# EAGLE board arduino_uno_pcb _with_lcd (EAGLE 6.1)
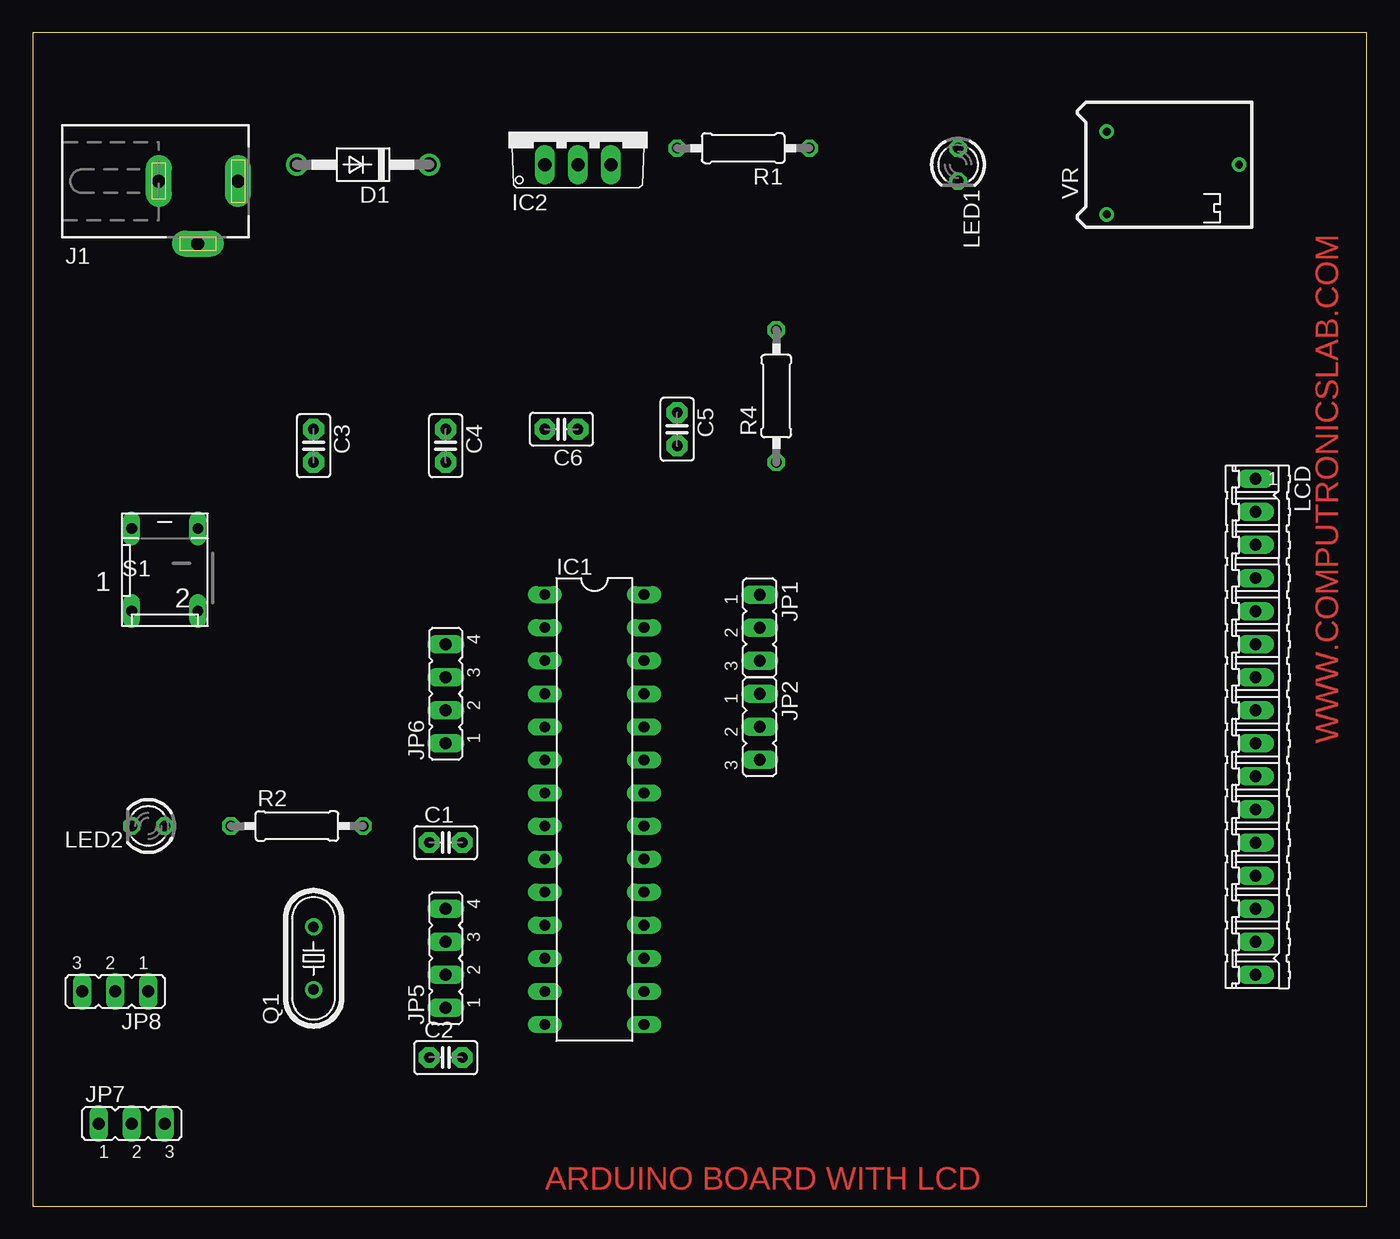
[diagram p0: board, top side]
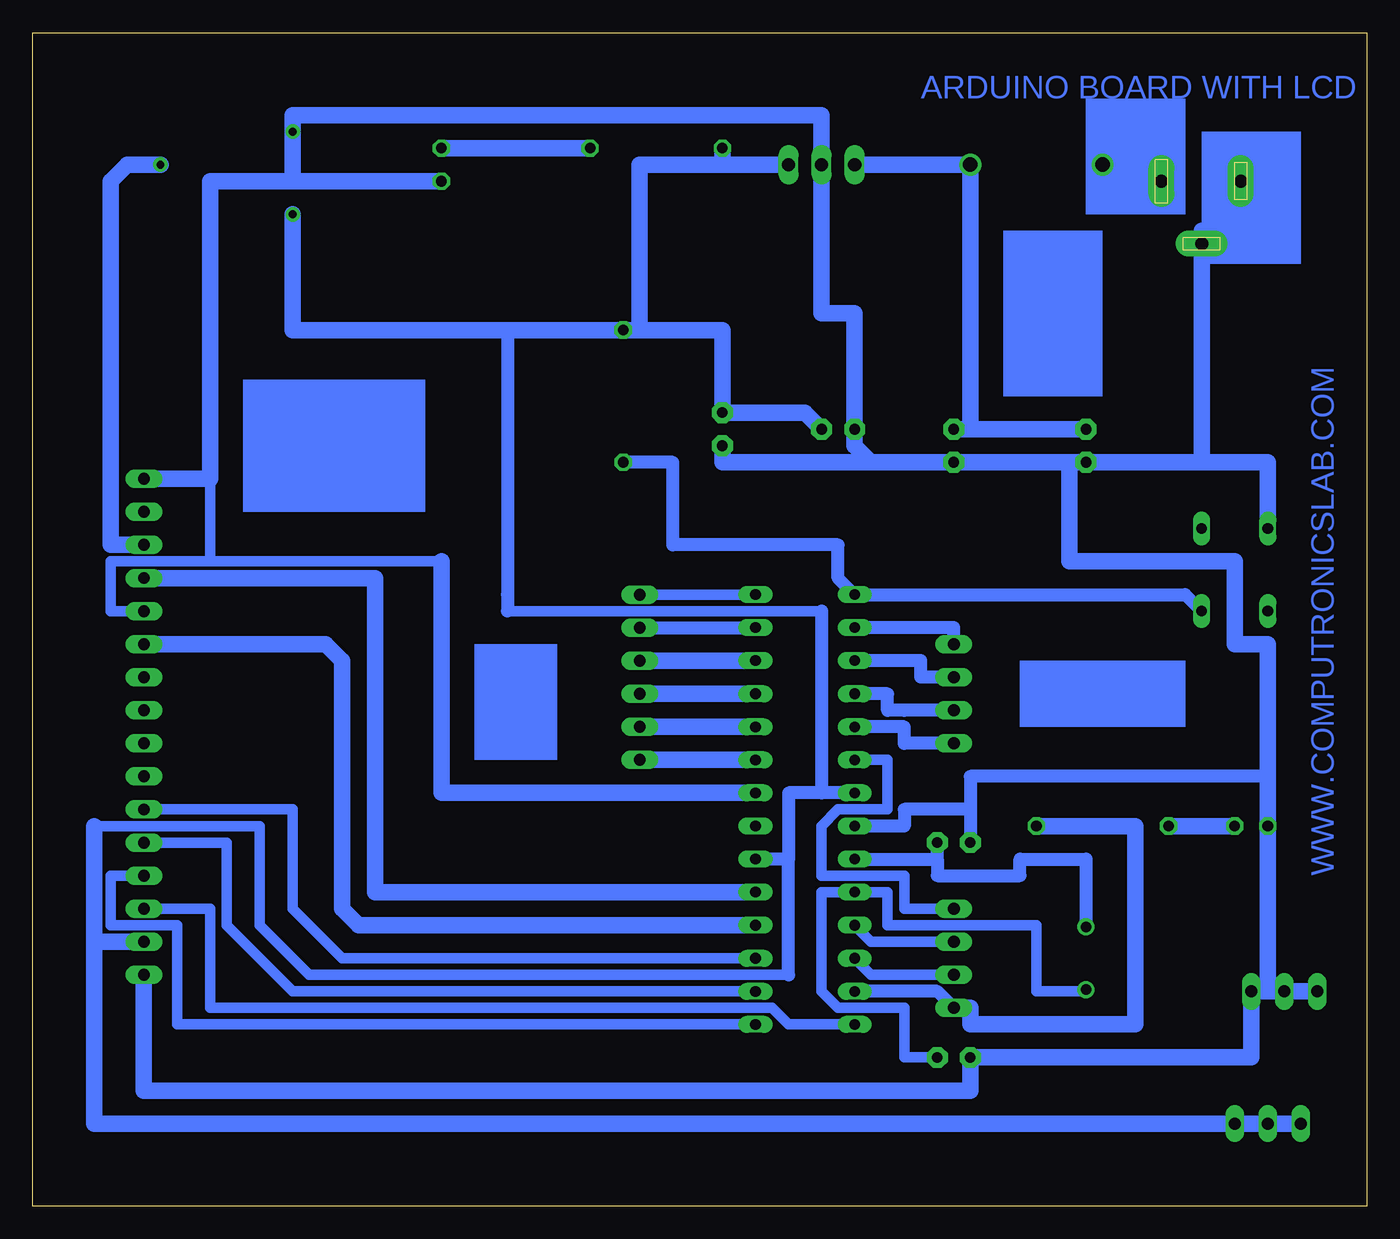
[diagram p1: board, bottom side, seen from below]

Size 102.54 x 90.16 mm. Coordinates in mm from the lower left corner, seen from the top.
Outline: 0,0 102.54,0 102.54,90.16 0,90.16 0,0
Copper layers (1*16): Top 0.035mm / dielectric 1.5mm / Bottom 0.035mm
Design rules: minimum track width 20mil, minimum drill 24mil, track to track 8mil, track to pad 8mil, pad to pad 8mil, via to via 8mil, smd to smd 8mil, copper to edge 40mil, drill to drill 8mil, minimum pad ring 10mil, minimum via ring 8mil, stop-mask expansion 4mil, vias tented up to drill 0mil, thermal gap 10mil

## Footprints (pad centres in the part's own frame; a part is rotated, then mirrored left to right if it is on the bottom)
C2.5-2 = drill 0.813 pad 1.6 octagon: 1 -1.27,0; 2 1.27,0
DO41-10 = drill 1.118: A 5.08,0; C -5.08,0
DIL28-3 = drill 0.813 long: 1 -16.51,-3.81; 2 -13.97,-3.81; 3 -11.43,-3.81; 4 -8.89,-3.81; 5 -6.35,-3.81; 6 -3.81,-3.81; 7 -1.27,-3.81; 8 1.27,-3.81; 9 3.81,-3.81; 10 6.35,-3.81; 11 8.89,-3.81; 12 11.43,-3.81; 13 13.97,-3.81; 14 16.51,-3.81; 15 16.51,3.81; 16 13.97,3.81; 17 11.43,3.81; 18 8.89,3.81; 19 6.35,3.81; 20 3.81,3.81; 21 1.27,3.81; 22 -1.27,3.81; 23 -3.81,3.81; 24 -6.35,3.81; 25 -8.89,3.81; 26 -11.43,3.81; 27 -13.97,3.81; 28 -16.51,3.81
TO220V = drill 1.016 long: 1 -2.54,-2.54; 2 0,-2.54; 3 2.54,-2.54
DCJ0303 = drill 1 pad 2 long: 1 0,3.1; 2 4.8,0; 3 0,-3
JP2 = drill 0.914 long: 1 -2.54,0; 2 0,0; 3 2.54,0
JP4 = drill 0.914 long: 1 -3.81,0; 2 -1.27,0; 3 1.27,0; 4 3.81,0
16P = drill 0.914 long: 1 -19.05,0; 2 -16.51,0; 3 -13.97,0; 4 -11.43,0; 5 -8.89,0; 6 -6.35,0; 7 -3.81,0; 8 -1.27,0; 9 1.27,0; 10 3.81,0; 11 6.35,0; 12 8.89,0; 13 11.43,0; 14 13.97,0; 15 16.51,0; 16 19.05,0
LED3MM = drill 0.813 octagon: A -1.27,0; K 1.27,0
HC49/S = drill 0.813: 1 -2.413,0; 2 2.413,0
0207/10 = drill 0.813 octagon: 1 -5.08,0; 2 5.08,0
DP-02 = drill 0.813 long: 1 -2.54,-2.54; 2 2.54,-2.54; 3 2.54,3.81; 4 -2.54,3.81
RTRIM64P = drill 0.61: 1 -2.54,-3.81; 2 7.62,0; 3 -2.54,2.54

## Placement (x,y rotation side)
C1  22pf  [C2.5-2]  31.75,27.94 0 top
C2  22pf  [C2.5-2]  31.75,11.43 0 top
C3  100UF  [C2.5-2]  21.59,58.42 270 top
C4  0.1uf  [C2.5-2]  31.75,58.42 270 top
C5  0.1uf  [C2.5-2]  49.53,59.69 270 top
C6  4.7uf  [C2.5-2]  40.64,59.69 180 top
D1  1N4007  [DO41-10]  25.4,80.01 180 top
IC1  ATMEGA328  [DIL28-3]  43.18,30.48 270 top
IC2  7805  [TO220V]  41.91,82.55 0 top
J1  [DCJ0303]  12.7,78.74 270 top
JP1  [JP2]  55.88,44.45 270 top
JP2  [JP2]  55.88,36.83 270 top
JP5  [JP4]  31.75,19.05 90 top
JP6  [JP4]  31.75,39.37 90 top
JP7  [JP2]  7.62,6.35 0 top
JP8  [JP2]  6.35,16.51 180 top
LCD  [16P]  93.98,36.83 270 top
LED1  [LED3MM]  71.12,80.01 270 top
LED2  [LED3MM]  8.89,29.21 180 top
Q1  16MHZ  [HC49/S]  21.59,19.05 90 top
R1  220R  [0207/10]  54.61,81.28 180 top
R2  330R  [0207/10]  20.32,29.21 0 top
R4  10K  [0207/10]  57.15,62.23 90 top
S1  [DP-02]  10.16,48.26 0 top
VR  100k  [RTRIM64P]  85.09,80.01 0 top

## Library data of the parts
C1-C6 = capacitor-wima
D1 = diode
IC1 = quantum-research-group; OC_FARNELL: unknown; OC_NEWARK: unknown
IC2 = linear
J1 = con-jack; OC_FARNELL: unknown; OC_NEWARK: unknown
JP1 JP2 JP5-JP8 = jumper
LCD = con-amp-quick; OC_FARNELL: unknown; OC_NEWARK: unknown
LED1 LED2 = led
Q1 = crystal; OC_FARNELL: 1667008; OC_NEWARK: unknown
R1 R2 R4 = rcl
S1 = switch-dil; MPN: MCDP02; OC_FARNELL: 1255233; OC_NEWARK: 26M1095
VR = resistor

## Nets
N$1: C1.2 IC1.9 Q1.2
N$2: C2.2 IC1.10 Q1.1
N$3: D1.A J1.1
N$4: C5.1 C6.1 IC1.7 IC1.20 IC2.3 JP7.1 JP7.2 JP7.3 LCD.15 R1.2 R4.2 VR.1
N$5: C1.1 C2.1 C3.2 C4.2 C5.2 C6.2 IC1.8 IC1.22 IC2.2 J1.2 J1.3 JP8.1 JP8.2 JP8.3 LCD.1 LCD.5 LCD.16 LED1.K LED2.K S1.4 VR.3
N$6: LED1.A R1.1
N$7: C3.1 C4.1 D1.C IC2.1
N$8: IC1.28 JP1.1
N$9: IC1.27 JP1.2
N$10: IC1.26 JP1.3
N$11: IC1.25 JP2.1
N$12: IC1.24 JP2.2
N$13: IC1.23 JP2.3
N$14: IC1.5 JP6.1
N$15: IC1.2 JP6.4
N$16: IC1.3 JP6.3
N$17: IC1.4 JP6.2
N$18: IC1.6 JP5.4
N$19: IC1.12 JP5.2
N$20: IC1.11 JP5.3
N$21: IC1.13 JP5.1 R2.2
N$22: LCD.3 VR.2
N$23: IC1.19 LCD.4
N$24: IC1.18 LCD.6
N$25: IC1.17 LCD.11
N$26: IC1.16 LCD.12
N$27: IC1.15 LCD.13
N$29: IC1.14 LCD.14
N$31: IC1.1 R4.1 S1.2
N$32: LED2.A R2.1

## Tracks (layer width: path | path; a pad name or v marks a point on that pad's centre or on a via)
N$1
  Bottom 1.016: Q1.2 21.59,26.67 26.67,26.67 26.67,25.4 33.02,25.4 33.02,26.67 | IC1.9 33.02,26.67 | 33.02,26.67 C1.2
N$2
  Bottom 0.508: 21.59,16.51 Q1.1
  Bottom 0.813: 21.59,16.51 25.4,16.51 25.4,21.59 36.83,21.59 36.83,24.13 IC1.10 41.91,24.13 41.91,16.51 40.64,15.24 35.56,15.24 35.56,11.43 C2.2
N$3
  Bottom 1.27: D1.A 19.05,78.74 J1.1
N$4
  Bottom 0.813: 41.91,45.72 58.42,45.72 66.04,45.72 | 44.45,17.78 81.28,17.78 85.09,21.59 85.09,29.21 97.79,29.21
  Bottom 1.016: 41.91,31.75 44.45,31.75 44.45,26.67 | IC1.7 41.91,31.75 | 41.91,45.72 41.91,31.75 | 66.04,45.72 66.04,46.99 66.04,67.31 | 44.45,26.67 IC1.20 | 44.45,17.78 44.45,26.67
  Bottom 1.27: C6.1 43.18,60.96 C5.1 49.53,67.31 55.88,67.31 | 49.53,80.01 53.34,80.01 55.88,80.01 55.88,67.31 | 49.53,80.01 R1.2 | IC2.3 49.53,80.01 | VR.1 82.55,67.31 66.04,67.31 R4.2 55.88,67.31 | JP7.1 JP7.2 JP7.3 97.79,6.35 97.79,20.32 | 97.79,20.32 97.79,29.21 | LCD.15 97.79,20.32
N$5
  Bottom 0.508: 12.7,74.93 J1.2 | C3.2 22.86,57.15
  Bottom 0.813: 88.9,55.88 88.9,49.53 | 88.9,49.53 71.12,49.53 | LCD.5 96.52,45.72 96.52,49.53 88.9,49.53
  Bottom 1.016: 30.48,30.48 35.56,30.48 35.56,29.21 IC1.8 | 30.48,30.48 30.48,33.02 7.62,33.02 | 30.48,30.48 C1.1
  Bottom 1.27: 7.62,16.51 LED2.K 7.62,33.02 7.62,43.18 10.16,43.18 10.16,49.53 22.86,49.53 22.86,57.15 | 7.62,16.51 JP8.2 JP8.3 | 7.62,16.51 JP8.1 8.89,11.43 C2.1 30.48,8.89 93.98,8.89 LCD.16 | 12.7,74.93 10.16,74.93 10.16,78.74 J1.3 | 12.7,57.15 7.62,57.15 S1.4 | 12.7,57.15 C3.2 C4.2 38.1,57.15 | 12.7,57.15 J1.2 | 38.1,57.15 39.37,58.42 C6.2 39.37,68.58 41.91,68.58 IC2.2 41.91,83.82 82.55,83.82 VR.3 82.55,78.74 | 38.1,57.15 49.53,57.15 C5.2 | LED1.K 82.55,78.74 | IC1.22 71.12,31.75 71.12,49.53 | 82.55,78.74 88.9,78.74 88.9,55.88 LCD.1
N$6
  Bottom 1.27: LED1.A R1.1
N$7
  Bottom 1.27: IC2.1 D1.C 30.48,59.69 | C4.1 30.48,59.69 | 30.48,59.69 C3.1
N$8
  Bottom 0.813: JP1.1 IC1.28
N$9
  Bottom 1.016: JP1.2 IC1.27
N$10
  Bottom 1.27: JP1.3 IC1.26
N$11
  Bottom 1.27: JP2.1 IC1.25
N$12
  Bottom 1.27: JP2.2 IC1.24
N$13
  Bottom 1.27: JP2.3 IC1.23
N$14
  Bottom 1.016: IC1.5 35.56,36.83 35.56,35.56 JP6.1
N$15
  Bottom 1.016: IC1.2 31.75,44.45 JP6.4
N$16
  Bottom 1.016: IC1.3 34.29,41.91 34.29,40.64 JP6.3
N$17
  Bottom 1.016: IC1.4 36.83,39.37 36.83,38.1 35.56,38.1 JP6.2
N$18
  Bottom 0.813: IC1.6 36.83,34.29 36.83,30.48 40.64,30.48 41.91,29.21 41.91,25.4 35.56,25.4 35.56,24.13 35.56,22.86 JP5.4
N$19
  Bottom 0.813: IC1.12 38.1,17.78 JP5.2
N$20
  Bottom 0.813: IC1.11 38.1,20.32 JP5.3
N$21
  Bottom 1.016: IC1.13 33.02,16.51 JP5.1
  Bottom 1.27: R2.2 17.78,29.21 17.78,15.24 17.78,13.97 30.48,13.97 30.48,15.24 JP5.1
N$22
  Bottom 1.27: VR.2 95.25,80.01 96.52,78.74 96.52,50.8 LCD.3
N$23
  Bottom 1.27: IC1.19 76.2,24.13 76.2,48.26 LCD.4
N$24
  Bottom 1.27: IC1.18 77.47,21.59 78.74,22.86 78.74,24.13 78.74,41.91 80.01,43.18 LCD.6
N$25
  Bottom 0.813: IC1.17 78.74,19.05 82.55,22.86 82.55,30.48 LCD.11
N$26
  Bottom 0.813: IC1.16 82.55,16.51 87.63,21.59 87.63,27.94 LCD.12
N$27
  Bottom 0.813: IC1.15 91.44,13.97 91.44,21.59 95.25,21.59 96.52,21.59 96.52,22.86 96.52,25.4 LCD.13
N$29
  Bottom 0.813: IC1.14 44.45,13.97 45.72,15.24 85.09,15.24 88.9,15.24 88.9,20.32 88.9,22.86 LCD.14
N$31
  Bottom 1.016: S1.2 13.97,46.99 IC1.1 40.64,48.26 40.64,50.8 53.34,50.8 53.34,53.34 53.34,57.15 R4.1
N$32
  Bottom 1.27: R2.1 LED2.A
(copper drawn outside any net)
  shapes: Bottom area x6

## Text on the board
Top: WWW.COMPUTRONICSLAB.COM | ARDUINO BOARD WITH LCD
Bottom: ARDUINO BOARD WITH LCD | WWW.COMPUTRONICSLAB.COM